# Altium PCB lagd_pcb.PcbDoc (part 4 of 7)
Units mm, origin at the board's own origin, x right, y up, seen from the top; angles counter-clockwise.
Board outline 172 x 145 mm, 6 copper layers (Top Layer, Layer 1, Layer 2, Layer 3, Layer 4, Bottom Layer), stack 0.816 mm thick; 588 components, 338 nets, 2165 pads, 565 vias.
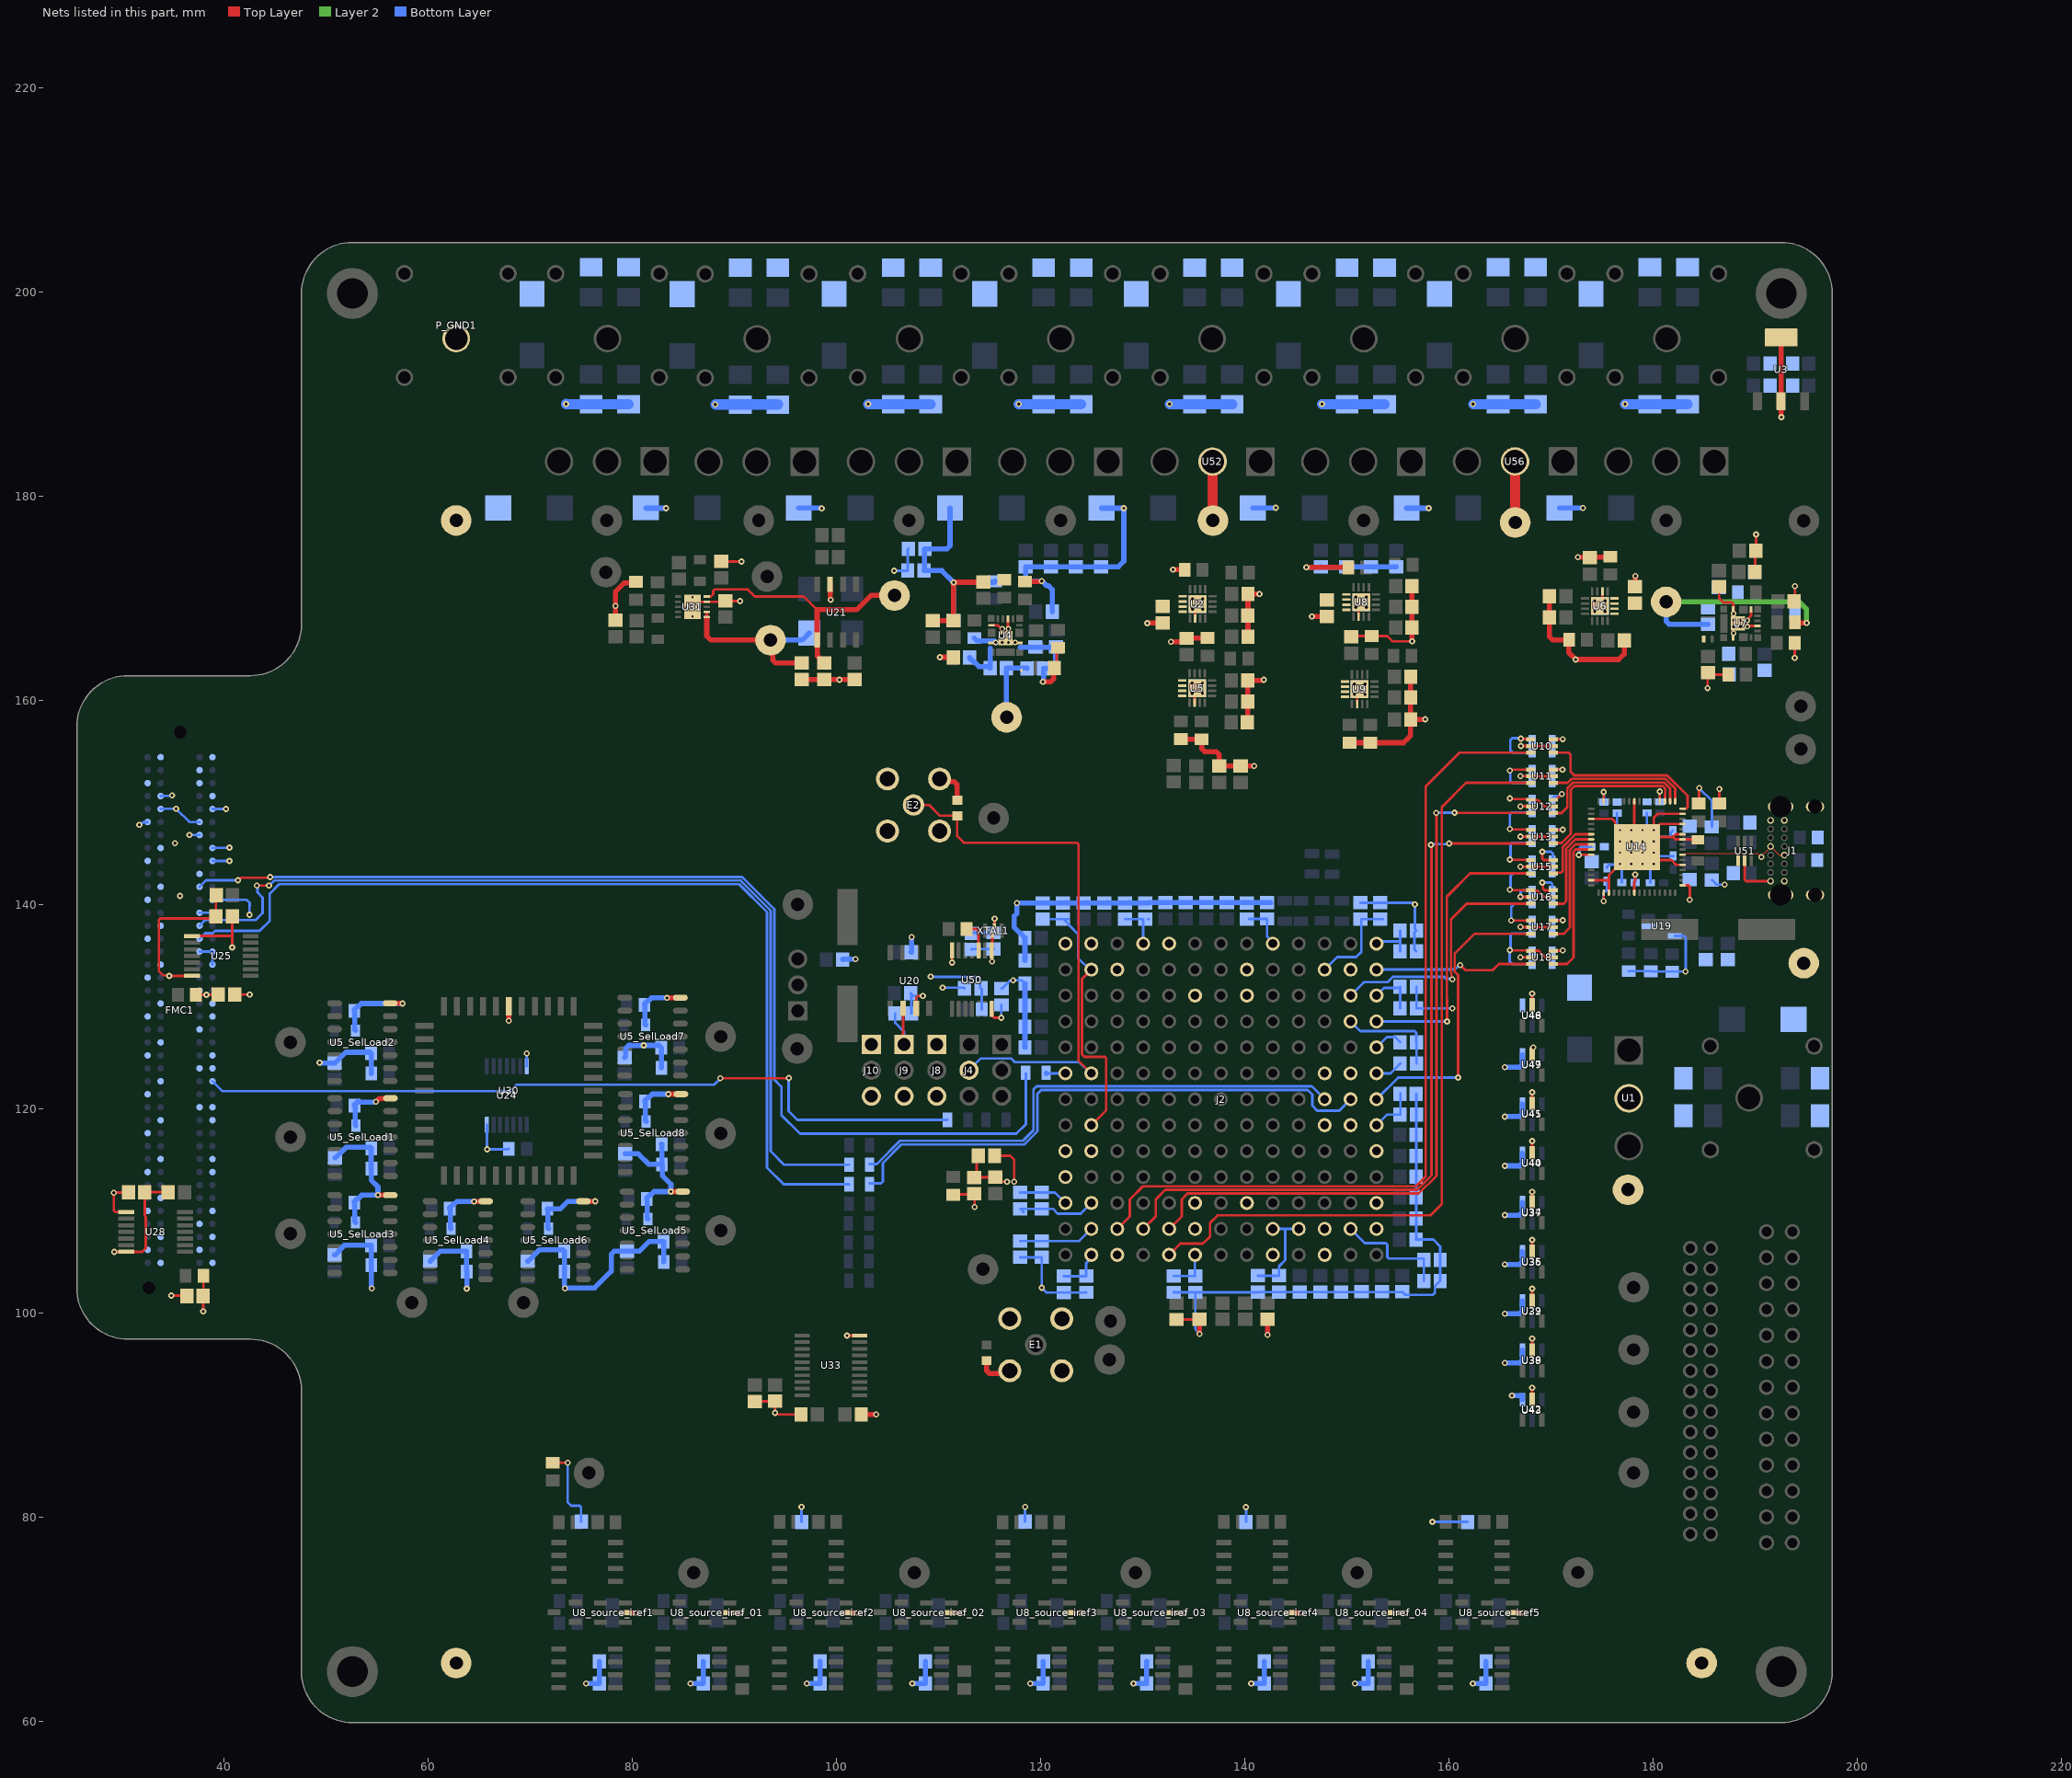
[diagram p7: the nets of this part, all layers, seen from the top]

## Part data (continued)
Y1: library part ABLS-12.000MHZ-B4-T, "CRYSTAL 12.0000MHZ 18PF SMD", ESR (Equivalent Series Resistance)="50 Ohms", Frequency Stability=±50ppm, Frequency Tolerance=±30ppm, Load Capacitance=18pF, MANUFACTURER="Abracon LLC", Operating Mode=Fundamental, Operating Temperature="-20°C ~ 70°C", Package / Case=HC-49/US, Supplier Part Number 1=535-10218-1-ND, ComponentLink1Description=Datasheet, ComponentLink1URL=https://abracon.com/Resonators/abls.pdf, ComponentLink2Description="DigiKey Link", ComponentLink2URL=https://www.digikey.com/en/products/detail/abracon-llc/ABLS-12-000MHZ-B4-T/2184161, Frequency="12 MHz", Height - Seated (Max)="0.165\" (4.20mm)", lastupdated="4/5/2026 8:41:04 PM", Lifecycle Status=Active, Minimum Order=1, Mounting Type="Surface Mount", packaging=TapeAndReel, PART NUMBER=ABLS-12.000MHZ-B4-T, Part Status=Active, partid=90, Price=0.11, series=ABLS, Size / Dimension="0.449\" L x 0.185\" W (11.40mm x 4.70mm)", Supplier 1=DigiKey, Type="MHz Crystal"
Y2: library part 9C-16.000MAAJ-T, "CRYSTAL 16.0000MHZ 18PF SMD", ESR (Equivalent Series Resistance)="30 Ohms", Frequency Stability=±30ppm, Load Capacitance=18pF, MANUFACTURER="TXC CORPORATION", Operating Mode=Fundamental, Operating Temperature="-20°C ~ 70°C", Package / Case=HC-49/US, Supplier Part Number 1=887-1059-1-ND, ComponentLink1Description=Datasheet, ComponentLink1URL=http://www.txccorp.com/download/products/quartz_crystals/2015TXC_9C_32.pdf, ComponentLink2Description="DigiKey Link", ComponentLink2URL=http://digikey.com/product-detail/en/txc-corporation/9C-16.000MAAJ-T/887-1059-1-ND/2118936, Frequency=16MHz, Frequency Tolerance=±30ppm, Height - Seated (Max)="0.161\" (4.10mm)", lastupdated="4/5/2026 8:41:30 PM", Lifecycle Status=Active, Minimum Order=1, Mounting Type="Surface Mount", packaging=TapeAndReel, PART NUMBER=9C-16.000MAAJ-T, Part Status=Active, partid=708, Price=0.22, series=9C, Size / Dimension="0.449\" L x 0.189\" W (11.40mm x 4.80mm)", Supplier 1=DigiKey, Type="MHz Crystal"

## Free pads (board coordinates)
  round 5 hole 3: ""(52.566,64.859) ""(52.566,199.859) ""(192.566,199.859) ""(192.566,64.859)
  rect 4x4 smd far side: ""(178.425,145.625)

## Via types
v1: diameter 0.6, hole 0.3, Top Layer to Bottom Layer, tented both sides, 505 vias
v2: diameter 0.3, hole 0.3, Top Layer to Bottom Layer, 20 vias
v3: diameter 0.55, hole 0.3, Top Layer to Bottom Layer, tented both sides, 18 vias
v4: diameter 0.55, hole 0.2, Top Layer to Bottom Layer, 16 vias
v5: diameter 0.6/0.6/0.6/0.6/0.6/0.6 (per signal layer), hole 0.3, Top Layer to Bottom Layer, tented both sides, 2 vias
v6: diameter 0.55/0.55/0.55/0.55/0.55/0.55 (per signal layer), hole 0.3, Top Layer to Bottom Layer, tented both sides, 2 vias
v7: diameter 1, hole 0.5, Top Layer to Bottom Layer, tented both sides, 2 vias

## Nets (pads, with @x,y where several pads share a name; then routed paths per layer and width w, separated by ;. In a path a pad name is that pad's centre, name@x,y a point inside that pad or via, vN(x,y) a via of type N, cw(c..) or ccw(c..) an arc to the next point about the centre after c; other vN are vias at no path point)
0.75V: C127.2 C128.2 C129.2 C130.2 C131.2 C132.2 C133.2 C134.2 C135.2 C136.2 C137.2 C138.2 C139.2 C140.2 C141.2 C142.2 J2.A2 J2.B12 J2.C2 J2.C6 J2.C8 J2.F2 J2.F11 J2.H13 J2.J13 J2.M2 J2.M11 J2.N9 J2.N13 U29.3 U34.3 U35.3 U38.3 U40.3 U41.3 U42.3 U46.3 U47.3 U52.2 VDDC.1 | length 92.7
  Top Layer w0.25: J2.F2@124.967,118.38 126.425,119.837 126.425,124.929 126.279,125.075 124.3,125.075 124.057,125.318 124.057,132.714 J2.M2@124.967,133.624 ; U42.3@168.15,91.541 v1(168.15,92.65) ; U38.3@168.15,95.866 U38.3@168.15,96.366 v1(168.15,97.475) ; U29.3@168.15,100.716 v1(168.15,102.375) ; U35.3@168.15,105.541 U35.3@168.15,106.041 168.15,106.15 v1(168.15,107.15) ; U34.3@168.15,110.366 v1(168.15,111.85) ; U40.3@168.15,115.216 v1(168.15,116.825) ; U41.3@168.15,120.516 v1(168.15,121.6) ; U47.3@168.15,124.841 U47.3@168.15,125.975 ; U46.3@168.15,129.666 168.153,129.669 U46.3@168.153,129.749 ; U46.3@168.153,130.163 v1@168.153,131.277
  Top Layer w1: U52.2@136.841,183.389 136.86,183.37 136.86,177.634 VDDC.1@136.88,177.615
  Bottom Layer w0.25: C138.2@118.317,109.874 C138.2@117.999,110.191 C137.2@120.103,110.191 121.213,110.191 121.679,109.725 123.928,109.725 J2.C2@124.967,110.764 ; 120.967,138.565 C141.2@122.766,138.565 ; C141.2@122.192,138.564 122.242,138.564 122.767,138.039 122.767,137.989 123.7,137.057 123.7,134.732 124.807,133.624 J2.M2@124.967,133.624 ; C135.2@122.267,103.589 124.435,103.589 C136.2@124.458,103.612 124.458,104.872 124.967,105.381 J2.A2@124.967,105.684 ; C140.2@140.417,138.564 140.442,138.589 C139.2@142.192,138.589 142.192,136.872 142.747,136.317 J2.N9@142.747,136.164 ; J2.M11@147.827,133.624 149.067,134.864 150.917,134.864 151.417,135.364 151.417,138.571 C133.2@153.525,138.571 ; J2.B12@150.367,108.224 151.752,106.839 153.821,106.839 153.967,106.693 153.967,105.462 154.114,105.316 157.544,105.316 C132.2@157.544,105.176 C131.2@157.544,103.129 ; J2.H13@152.907,123.464 154.292,123.464 155.219,124.392 C129.2@155.219,124.442 ; J2.J13@152.907,126.004 153.917,127.014 154.718,127.014 C130.2@155.219,126.513 ; J2.N13@152.907,136.164 153.122,136.379 155.219,136.379 ; C127.2@155.219,135.406 155.219,136.379 ; C128.2@155.219,137.451 155.219,136.379
  other v1: 168.255,125.993 168.156,131.277
1.0V: 12.1 C12.1 C26.2 C27.2 C47.1 L1.2 R12.2 U2.1 U2.2 U2.3 U2.4 U5.1 U5.2 U5.3 U5.4 U8.1 U8.2 U8.3 U8.4 U9.1 U9.2 U9.3 U9.4 | length 6.9
  Bottom Layer w0.5: C26.2@116.647,163.164 C26.2@116.66,163.152 ; 12.1@116.672,158.34 116.66,158.352 C26.2@116.66,163.152 ; C27.2@118.672,163.14 118.66,163.152 C26.2@116.66,163.152
1AD0: U10.4 U14.16 | length 17.5
  Top Layer w0.25: U10.4@170.217,154.875 171.7,154.875 171.925,154.65 171.925,153 172.275,152.65 181.375,152.65 183.375,150.65 183.375,149.531 183.229,149.385 U14.16@182.893,149.385
1AD0/: J2.B3 U10.3 | length 83.3
  Top Layer w0.25: J2.B3@127.507,108.224 128.737,109.454 128.737,111.114 130.017,112.394 156.754,112.394 157.725,113.365 157.725,151.575 161.025,154.875 U10.3@168.15,154.875
1AD1: U11.4 U14.17 | length 13.7
  Top Layer w0.25: U11.4@170.217,151.918 171.624,151.918 172.007,152.3 181.23,152.3 182.168,151.362 U14.17@182.168,150.11
1AD1/: J2.A5 U11.3 | length 78.3
  Top Layer w0.25: J2.A5@132.587,105.684 133.678,106.775 135.9,106.775 136.6,107.475 136.6,108.8 137.35,109.55 158.178,109.55 159.3,110.672 159.3,149.55 161.683,151.933 U11.3@168.195,151.933
1AD2: U12.4 U14.18 | length 15.3
  Top Layer w0.25: U12.4@170.217,148.961 171.016,148.961 171.6,149.545 171.6,151.399 172.151,151.95 181.085,151.95 181.668,151.367 U14.18@181.668,150.11
1AD2/: J2.B5 U12.3 | length 74.1
  Top Layer w0.25: J2.B5@132.587,108.224 133.817,109.454 133.817,111.114 134.392,111.689 157.039,111.689 158.775,113.425 v1(158.775,148.975) ; v1(160.55,149) 160.57,148.98 167.997,148.98 U12.3@168.01,148.968
  Bottom Layer w0.25: v1(158.775,148.975) 158.788,148.987 160.537,148.987 v1(160.55,149)
1AD3: U13.4 U14.19 | length 17.2
  Top Layer w0.25: U13.4@170.217,146.004 170.226,146.013 171.038,146.013 171.95,146.925 171.95,151.254 172.296,151.6 180.94,151.6 181.2,151.34 181.2,150.855 181.168,150.823 U14.19@181.168,150.11
1AD3/: J2.B4 U13.3 | length 73.6
  Top Layer w0.25: J2.B4@130.047,108.224 131.277,109.454 131.277,111.114 132.207,112.044 156.899,112.044 158.3,113.445 158.3,145.8 v1(158.25,145.85) ; v1(160.025,145.977) 160.038,145.99 168.004,145.99 U13.3@168.017,146.004
  Bottom Layer w0.25: v1(158.25,145.85) 158.313,145.913 159.962,145.913 v1(160.025,145.977)
1CD0: U14.38 U15.4 | length 6.7
  Top Layer w0.25: U15.4@170.217,143.047 170.286,143.116 171.004,143.116 171.15,143.262 171.15,145.63 172.405,146.885 U14.38@173.943,146.885
1CD0/: J2.K13 U15.3 | length 28.3
  Top Layer w0.25: v1(159.825,128.539) 159.825,130.784 159.8,130.809 159.8,140.775 162.072,143.047 U15.3@168.017,143.047
  Bottom Layer w0.25: J2.K13@152.907,128.544 152.91,128.542 159.822,128.542 v1(159.825,128.539)
1CD1: U14.39 U16.4 | length 9.3
  Top Layer w0.25: U16.4@170.217,140.09 171.254,140.09 171.5,140.336 171.5,145.485 172.4,146.385 U14.39@173.943,146.385
1CD1/: J2.L12 U16.3 | length 25.2
  Top Layer w0.25: v1(160.325,132.675) 160.258,132.742 160.258,133.224 160.2,133.282 160.2,138.55 161.74,140.09 U16.3@168.017,140.09
  Bottom Layer w0.25: J2.L12@150.367,131.084 151.672,132.389 153.989,132.389 154.514,132.914 159.525,132.914 159.698,132.742 160.258,132.742 v1(160.325,132.675)
1CD2: U14.40 U17.4 | length 11.8
  Top Layer w0.25: U17.4@170.217,137.133 171.258,137.133 171.85,137.725 171.85,145.34 172.395,145.885 U14.40@173.943,145.885
1CD2/: J2.G13 U17.3 | length 29.4
  Top Layer w0.25: v1(160.9,123.05) 160.9,133.077 160.575,133.402 160.575,135.2 162.508,137.133 U17.3@168.017,137.133
  Bottom Layer w0.25: J2.G13@152.907,120.924 155.033,123.05 v1(160.9,123.05)
1CD3: U14.41 U18.4 | length 14.5
  Top Layer w0.25: U18.4@170.217,134.176 171.576,134.176 172.2,134.8 172.2,145.195 172.39,145.385 U14.41@173.943,145.385
1CD3/: J2.M13 U18.3 | length 15.8
  Top Layer w0.25: v1(161.1,134.075) 161.611,133.564 164.289,133.564 164.9,134.175 U18.3@168.017,134.176
  Bottom Layer w0.25: J2.M13@152.907,133.624 160.596,133.624 161.046,134.075 v1(161.1,134.075)
2.0V: 13.1 C33.1 C48.2 L2.2 R25.2 U6.1 U6.2 U6.3 U6.4 | length 22.7
  Top Layer w0.5: R25.2@193.895,167.636 193.937,167.594 195.031,167.594 v1(195.05,167.575)
  Layer 2 w0.5: 13.1@181.286,169.65 194.325,169.65 195.05,168.925 v1(195.05,167.575)
  Bottom Layer w0.5: 13.1@181.286,169.65 181.286,167.754 181.579,167.461 C48.2@185.371,167.461
3V3_MUXED: C68.2 C70.2 C72.2 C74.2 C75.1 C76.2 C77.2 C78.2 C81.2 C83.2 C85.2 C87.2 C89.2 C95.2 C210.2 C211.2 C212.2 FB2.1 FB3.1 J8.1 J9.1 J10.1 R31.2 R34.1 R35.1 R36.1 R46.1 U1.2 U10.6 U11.6 U12.6 U13.6 U14.20 U14.31 U14.42 U14.50 U14.56 U15.6 U16.6 U17.6 U18.6 U19.6 U20.2 U50.1 VDD1.1 XTAL1.4 | length 69.9
  Top Layer w0.25: U20.2@106.532,129.826 106.537,129.821 J9.1@106.537,126.304 ; v1(115.242,134.414) 115.23,134.427 115.23,135.548 115.217,135.56 115.261,135.604 XTAL1.4@115.261,137.018 ; v1(169.15,142.15) 169.217,142.083 169.217,141.565 169.392,141.39 U16.6@170.217,141.39 ; v1(169.15,145.175) 169.15,144.493 169.296,144.347 U15.6@170.217,144.347 ; U12.6@170.217,150.261 170.467,150.261 171.031,150.825 v1(171.075,150.825) ; U10.6@170.217,156.175 170.229,156.187 171.137,156.187 v1(171.149,156.2) ; U13.6@170.229,147.312 v1@171.137,147.312 ; U11.6@170.254,153.212 170.262,153.22 171.125,153.22 v1(171.127,153.222) ; U17.6@170.279,138.437 v1@171.187,138.437 ; U18.6@170.304,135.487 v1@171.212,135.487 ; v1(172.725,144.86) 172.75,144.885 U14.42@173.943,144.885 ; v1(175.15,140.325) 175.168,140.343 U14.50@175.168,141.16 ; U14.31@175.168,150.11 175.168,151.018 v1(175.175,151.025) ; U14.56@178.168,141.16 178.168,142.243 178.25,142.325 v1(178.25,142.95) ; U14.20@180.668,150.11 v1(180.668,151.075) ; R31.2@184.475,149.9 184.5,149.925 v1@184.5,151.4
  Bottom Layer w0.25: C95.2@105.742,129.34 105.746,129.336 105.746,128.411 106.624,127.533 J9.1@106.624,126.304 ; v1(109.225,132.925) 113.932,132.925 114.079,132.779 114.079,131.853 C211.2@114.142,131.789 114.217,131.714 R46.1@114.217,129.739 ; C212.2@113.242,135.59 113.292,135.64 C210.2@115.392,135.64 115.242,135.49 v1(115.242,134.414) ; v1(169.15,142.15) 169.979,142.15 170.125,142.004 C85.2@170.125,141.375 ; v1(169.15,145.175) 170.004,145.175 170.175,145.004 170.175,144.425 C83.2@170.125,144.375 ; C89.2@170.125,135.45 170.175,135.5 v1(171.149,135.5) ; C87.2@170.125,138.475 170.15,138.45 v1(171.149,138.45) ; C74.2@170.125,147.35 170.15,147.325 v1(171.149,147.325) ; C72.2@170.125,150.292 170.125,150.392 170.35,150.617 170.772,150.617 170.98,150.825 v1(171.075,150.825) ; C70.2@170.125,153.233 170.136,153.222 v1(171.127,153.222) ; C68.2@170.125,156.175 170.15,156.2 v1(171.149,156.2) ; v1(172.725,144.86) 172.792,144.927 172.792,145.529 172.938,145.675 C75.1@173.925,145.675 ; v1(175.15,140.325) 175.15,141.119 175.475,141.444 C81.2@175.475,142.275 ; v1(175.175,151.025) 175.175,150.05 C78.2@175.2,150.025 ; R36.1@177.6,133.475 R34.1@179.775,133.475 ; C76.2@178.25,142.15 v1(178.25,142.95) ; R34.1@179.775,133.45 179.8,133.425 v1(183.175,133.425) 183.2,133.45 183.2,136.754 183.029,136.925 U19.6@182.125,136.925 ; v1(180.668,151.075) 180.668,150.082 C77.2@180.7,150.05 ; v1(184.525,151.4) 185.764,150.161 FB2.1@185.764,147.6 ; FB3.1@185.764,142.405 186.219,141.95 v1(187,141.95)
10V: 10V.1 C113.2 D2.2 U31.1 U31.2 | length 17.9
  Top Layer w0.25: U31.1@87.288,168.162 U31.2@87.288,168.662
  Top Layer w0.5: U31.1@87.288,168.162 87.288,166.312 87.7,165.9 10V.1@93.535,165.9 93.76,165.675 93.76,163.943 94.053,163.65 C113.2@96.6,163.65
  Bottom Layer w0.5: 10V.1@93.535,165.9 96.647,165.9 D2.2@97.34,166.593
-5V: C114.2 m5V.1 U21.5 U31.5 | length 25.8
  Top Layer w0.25: U31.5@87.288,170.162 87.688,170.162 87.913,170.387 87.913,170.715 88.06,170.861 91.314,170.861 92,170.175 93.773,170.175 96.805,170.175 98.105,168.875
  Top Layer w0.5: C114.2@98.8,163.65 98.75,163.65 98.35,164.05 98.35,164.125 98.132,164.343 98.132,165.884 U21.5@98.102,165.914 98.102,168.875 101.975,168.875 103.375,170.275 m5V.1@105.686,170.275
A0: C1.2 C3.2 C4.2 C5.2 C6.2 C7.2 C8.2 C9.2 C10.2 C11.2 C12.2 C13.1 C14.1 C15.1 C16.1 C17.1 C18.1 C19.1 C20.1 C21.1 C22.2 C23.1 C24.1 C26.1 C27.1 C28.2 C29.1 C30.1 C31.1 C32.1 C33.2 C34.1 C35.1 C36.1 C37.1 C38.1 C39.1 C40.1 C41.1 C42.1 C43.2 C44.1 C45.1 C47.2 C48.1 C49.1 C50.1 C51.2 C52.1 C53.1 C54.1 C55.2 C56.1 C57.1 C58.1 C59.1 C60.1 C61.1 C62.1 C63.1 C64.1 C65.1 C66.2 C67.2 C68.1 C69.2 C70.1 C71.2 C72.1 C73.2 C74.1 C75.2 C76.1 C77.1 C78.1 C79.1 C80.1 C81.1 C82.2 C83.1 C84.2 C85.1 C86.2 C87.1 C88.2 C89.1 C90.1 C91.1 C92.1 C93.1 C94.1 C95.1 C96.2 C97.2 C98.2 C99.2 C100.2 C101.2 C102.2 C103.2 C104.2 C105.2 C106.2 C107.2 C108.2 C109.2 C110.2 C113.1 C114.1 C115.1 C116.1 C117.1 C118.1 C119.1 C120.1 C121.1 C122.1 C123.1 C124.1 C125.1 C126.1 C127.1 C128.1 C129.1 C130.1 C131.1 C132.1 C133.1 C134.1 C135.1 C136.1 C137.1 C138.1 C139.1 C140.1 C141.1 C142.1 C144.1 C145.1 C146.1 C147.1 C148.1 C149.1 C150.1 C151.1 C152.1 C153.1 C154.1 C155.1 C156.1 C157.1 C158.1 C159.1 C160.1 C162.1 C163.1 C164.1 C165.1 C166.1 C167.1 C168.1 C169.1 C170.1 C171.1 C172.1 C173.1 C174.1 C175.1 C176.1 C177.1 C178.1 C179.1 C180.1 C181.1 C184.1 C185.1 C186.2 C187.1 C188.1 C189.2 C190.2 C191.1 C192.1 C193.2 C194.1 C195.2 C196.1 C199.1 C201.1 C203.1 C204.1 C205.1 C206.1 C207.1 C208.1 C209.1 C210.1 C211.1 C212.1 C213.1 C214.2 C215.2 C216_source_iref1.1 C216_source_iref2.1 C216_source_iref3.1 C216_source_iref4.1 C216_source_iref5.1 C216_source_iref_01.1 C216_source_iref_02.1 C216_source_iref_03.1 C216_source_iref_04.1 C220_SelLoad1.1 C220_SelLoad2.1 C220_SelLoad3.1 C220_SelLoad4.1 C220_SelLoad5.1 C220_SelLoad6.1 C220_SelLoad7.1 C220_SelLoad8.1 C221.2 C222.2 C223.2 C224.2 C225.2 C226.2 C227.2 C228.2 C229.2 C230.2 C231.2 C232.2 C233.2 C234.2 C235.2 C236.2 C237.1 C239.1 C240.1 C242_u_sink_iref_gen1.1 C242_u_sink_iref_gen2.1 C242_u_sink_iref_gen3.1 C242_U_sink_iref_gen4.1 C242_u_sink_iref_gen5.1 C243_source_iref1.1 C243_source_iref2.1 C243_source_iref3.1 C243_source_iref4.1 C243_source_iref5.1 C243_source_iref_01.1 C243_source_iref_02.1 C243_source_iref_03.1 C243_source_iref_04.1 C244.2 C245.2 C246.2 C247.2 C248.2 C249.2 C250.2 C251.2 E1.SH1 E1.SH2 E1.SH3 E1.SH4 E2.SH1 E2.SH2 E2.SH3 E2.SH4 FMC1.C1 FMC1.C4 FMC1.C5 FMC1.C8 FMC1.C9 FMC1.C12 FMC1.C13 FMC1.C16 FMC1.C17 FMC1.C20 FMC1.C21 FMC1.C24 FMC1.C25 FMC1.C28 FMC1.C29 FMC1.C32 FMC1.C33 FMC1.C36 FMC1.C38 FMC1.C40 FMC1.D2 FMC1.D3 FMC1.D6 FMC1.D7 FMC1.D10 FMC1.D13 FMC1.D16 FMC1.D19 FMC1.D22 FMC1.D25 FMC1.D28 FMC1.D37 FMC1.D39 FMC1.G1 FMC1.G4 FMC1.G5 FMC1.G8 FMC1.G11 FMC1.G14 FMC1.G17 FMC1.G20 FMC1.G23 FMC1.G26 FMC1.G29 FMC1.G32 FMC1.G35 FMC1.G38 FMC1.G40 FMC1.H3 FMC1.H6 FMC1.H9 FMC1.H12 FMC1.H15 FMC1.H18 FMC1.H21 FMC1.H24 FMC1.H27 FMC1.H30 FMC1.H33 FMC1.H36 FMC1.H39 GND1.1 GND2.1 GND3.1 GND4.1 J1.1 J1.8 J1.9 J1.16 J1.17 J1.18 J1.19 J1.20 J2.A9 J2.A11 J2.B6 J2.B11 J2.B13 J2.C1 J2.C13 J2.D1 J2.E2 J2.E13 J2.F12 J2.H12 J2.K12 J2.L8 J2.M12 J2.N1 J2.N2 J2.N5 J8.3 J9.3 J10.3 P_GND1.1 pad.@178.425,145.625 R2.1 R3_SelLoad1.1 R3_SelLoad2.1 R3_SelLoad3.1 R3_SelLoad4.1 R3_SelLoad5.1 R3_SelLoad6.1 R3_SelLoad7.1 R3_SelLoad8.1 R4_SelLoad1.1 R4_SelLoad2.1 R4_SelLoad3.1 R4_SelLoad4.1 R4_SelLoad5.1 R4_SelLoad6.1 R4_SelLoad7.1 R4_SelLoad8.1 R5_SelLoad1.1 R5_SelLoad2.1 R5_SelLoad3.1 R5_SelLoad4.1 R5_SelLoad5.1 R5_SelLoad6.1 R5_SelLoad7.1 R5_SelLoad8.1 R6_SelLoad1.1 R6_SelLoad2.1 R6_SelLoad3.1 R6_SelLoad4.1 R6_SelLoad5.1 R6_SelLoad6.1 R6_SelLoad7.1 R6_SelLoad8.1 R9.1 R13.1 R14.1 R15.1 R17.1 R19.1 R20.1 R21.1 R22.1 R23.1 R27.1 R28.1 R29.1 R32.1 R33.1 R45.1 R48.1 R69.2 R70.2 R71.1 R72.1 R73.1 R74.1 R75.1 R79.2 U2.6 U2.17 U3.2 U3.4 U4.2 U4.4 U4.8 U4.13 U4.16 U5.6 U5.17 U5_SelLoad1.7 U5_SelLoad2.7 U5_SelLoad3.7 U5_SelLoad4.7 U5_SelLoad5.7 U5_SelLoad6.7 U5_SelLoad7.7 U5_SelLoad8.7 U6.6 U6.17 U7.2 U7.4 U7.8 U7.13 U7.16 U8.6 U8.17 U8_source_iref1.2 U8_source_iref2.2 U8_source_iref3.2 U8_source_iref4.2 U8_source_iref5.2 U8_source_iref_01.2 U8_source_iref_02.2 U8_source_iref_03.2 U8_source_iref_04.2 U9.6 U9.17 U10.2 U10.5 U11.2 U11.5 U12.2 U13.2 U13.5 U14.1 U14.5 U14.10 U14.11 U14.13 U14.15 U14.25 U14.35 U14.47 U14.51 U14.65 U15.2 U15.5 U16.2 U17.2 U17.5 U18.2 U19.2 U20.3 U21.3 U24.7 U25.7 U28.7 U30.23 U31.4 U31.11 U32.1 U33.10 U36.1 U37.1 U39.1 U43.1 U44.1 U45.1 U48.1 U49.1 U50.7 U51.2 XTAL1.2 | length 772.6
  Top Layer w0.25: v1(29.225,105.975) 29.228,105.978 30.369,105.978 U28.7@30.372,105.981 ; U28.7@30.423,105.981 31.981,105.981 32.325,106.325 32.325,109.379 32.225,109.479 C201.1@32.225,111.825 C203.1@34.525,111.825 ; v1(34.825,101.7) 36.3,101.7 C199.1@36.35,101.65 ; U25.7@36.858,133.011 36.852,133.005 34.63,133.005 v1(34.625,133) 34.558,133.067 34.033,133.067 33.6,133.5 33.6,138.475 33.75,138.625 38.975,138.625 C194.1@39.2,138.85 39.2,140.9 C192.1@39.225,140.925 ; C196.1@41.025,131.175 v1(42.5,131.175) ; R45.1@72.175,85.325 v1(73.65,85.325) ; U31.11@85.888,169.162 86.388,169.662 U31.4@87.288,169.662 C239.1@89.112,169.662 ; C240.1@88.712,173.613 88.725,173.6 v1(90.675,173.6) ; C239.1@89.112,169.762 89.149,169.725 v1(90.55,169.725) ; C207.1@92,91.325 93.95,91.325 C208.1@93.975,91.35 v1(93.975,90.2) 94.125,90.05 C204.1@96.525,90.05 ; v1(101.025,97.775) U33.10@102.275,97.775 ; U20.3@107.802,129.826 107.802,130.893 107.949,131.04 v1(108.467,131.04) ; v1(111.317,134.314) U50.7@111.317,135.33 ; C19.1@111.437,164.225 C19.1@111.447,164.215 ; C187.1@113.892,115.389 113.725,115.222 113.725,113.497 C191.1@113.492,113.264 115.542,113.264 C188.1@115.567,113.289 ; U4.2@115.162,167.36 115.796,167.36 v6@116.155,167.001 ; XTAL1.2@115.467,137.874 115.479,137.886 115.479,138.601 v1(115.492,138.614) ; C188.1@115.581,113.304 116.035,112.85 v1(116.7,112.85) ; U4.13@116.797,167.99 116.797,167.056 v3(116.847,167.006) ; C29.1@121.562,163.36 R22.1@121.562,165.135 ; C179.1@133.3,99.35 135.55,99.35 135.563,99.362 C184.1@135.575,99.375 ; v2(134.832,160.688) 134.847,160.688 135.09,160.445 U5.6@135.09,159.748 ; v2(134.875,168.932) 134.889,168.932 135.132,168.688 U2.6@135.132,167.992 ; C50.1@150.427,166.218 150.502,166.293 R73.1@152.452,166.293 153.959,166.293 154.463,165.79 v1(156.392,165.79) ; v2(150.75,160.58) 150.764,160.58 151.008,160.337 U9.6@151.008,159.64 ; v2(150.892,169.115) 150.907,169.115 151.15,168.871 U8.6@151.15,168.175 ; v1(167.021,134.834) U18.2@167.988,134.834 ; v1(167.021,137.791) U17.2@167.988,137.791 ; v1(167.021,140.748) U16.2@167.988,140.748 ; v1(167.021,143.705) U15.2@167.988,143.705 ; v1(167.021,146.662) U13.2@167.988,146.662 ; v1(167.021,149.619) U12.2@167.988,149.619 ; v1(167.021,152.576) U11.2@167.988,152.576 ; v1(167.05,155.525) U10.2@168.017,155.525 U10.5@170.217,155.525 ; U17.2@168.017,137.783 U17.5@170.217,137.783 ; U15.2@168.017,143.697 U15.5@170.217,143.697 ; U13.2@168.017,146.654 U13.5@170.217,146.654 ; U11.2@168.017,152.568 U11.5@170.217,152.568 ; U14.47@173.943,142.385 175.653,142.385 175.668,142.4 ; U14.35@173.943,148.385 176.015,148.385 176.293,148.107 176.293,147.76 v4(176.768,147.285) ; U6.17@174.786,169.231 175.036,169.481 U6.6@175.036,170.679 ; U14.51@175.668,141.16 175.668,142.4 ; v4(176.768,143.985) 175.668,142.885 175.668,142.4 ; v4(177.868,147.285) 178.168,147.585 U14.25@178.168,150.11 ; v4(178.968,145.085) 179.695,144.359 181.791,144.359 182.265,143.885 U14.5@182.893,143.885 ; v4(180.068,146.185) 180.483,146.6 181.975,146.6 182.04,146.535 ; U14.1@182.893,141.885 183.454,141.885 183.6,141.739 v1(183.6,140.475) ; U14.11@182.893,146.885 182.213,146.885 182.04,146.712 182.04,146.535 ; U14.13@182.893,147.885 181.68,147.885 180.668,147.885 180.075,147.292 180.075,148.5 180.46,148.885 U14.15@182.893,148.885 ; R33.1@184.4,146.35 184.365,146.385 U14.10@182.893,146.385 182.693,146.385 182.19,146.385 182.04,146.535 ; v1(185.35,161.2) 185.35,162.665 C49.1@185.396,162.711 185.596,162.511 R72.1@187.371,162.511 ; C40.1@186.471,171.136 186.471,170.004 186.9,169.575 187.737,169.575 187.895,169.416 v3(187.895,168.486) ; R32.1@186.5,149.9 v1(186.5,151.325) ; U51.2@188.976,144.278 188.976,142.436 189.122,142.29 J1.1@191.516,142.29 ; v3(189.236,167.236) 189.286,167.286 U7.13@190.221,167.286 ; v6(189.236,167.836) 189.236,167.917 189.596,168.276 U7.2@189.596,168.911 ; C37.1@189.996,172.586 189.996,174.586 C41.1@190.071,174.661 190.1,174.69 v1(190.1,176.25) ; C52.1@193.821,169.711 193.9,169.79 v1(193.9,171.2) ; R71.1@193.871,165.611 193.875,165.606 v1(193.875,164.15)
  Top Layer w0.5: v1(54.875,120.675) 54.902,120.675 55.233,121.006 56.281,121.006 U5_SelLoad1.7@56.3,121.025 ; v1(55.075,111.525) U5_SelLoad3.7@56.275,111.525 ; U5_SelLoad2.7@56.275,130.325 56.287,130.312 57.463,130.312 v1(57.475,130.3) ; v1(64.487,110.912) 65.613,110.912 U5_SelLoad4.7@65.625,110.925 ; v1(67.9,128.6) U30.23@67.9,130.03 ; U5_SelLoad6.7@75.2,110.925 v1(76.35,110.925) ; C237.1@78.363,167.838 78.356,167.844 78.356,169.244 v1(78.35,169.25) 78.35,170.65 79.205,171.505 80.23,171.505 R48.1@80.337,171.612 ; U8_source_iref1.2@79.323,70.616 U8_source_iref1.2@79.327,70.62 ; U8_source_iref1.2@79.33,70.622 v1@80.472,70.622 ; v1(83.4,130.85) 83.412,130.862 84.688,130.862 U5_SelLoad7.7@84.7,130.875 ; v1(83.525,121.425) U5_SelLoad8.7@84.75,121.425 ; v1(83.775,111.875) U5_SelLoad5.7@84.925,111.875 ; U8_source_iref_01.2@89.523,70.616 U8_source_iref_01.2@89.526,70.618 ; U8_source_iref_01.2@89.527,70.62 U8_source_iref_01.2@89.526,70.618 ; v1@90.668,70.618 U8_source_iref_01.2@89.526,70.618 ; C113.1@97.086,162.053 98.8,162.053 98.815,162.037 100.288,162.037 v1(100.3,162.025) 100.314,162.039 101.771,162.039 C209.1@101.785,162.053 ; U21.3@99.372,171.362 99.374,171.361 99.374,169.928 99.425,169.877 v1(99.425,169.85) ; U8_source_iref2.2@100.948,70.616 U8_source_iref2.2@100.951,70.618 ; U8_source_iref2.2@100.952,70.62 U8_source_iref2.2@100.951,70.618 ; v1@102.093,70.618 U8_source_iref2.2@100.951,70.618 ; C205.1@102.425,90.05 v1(103.875,90.05) ; C20.1@109.447,167.79 C16.1@111.472,167.79 ; E2.SH2@110.1,152.3 110.342,152.058 111.51,152.058 111.803,151.765 111.803,150.395 111.825,150.373 R79.2@111.825,150.215 ; v1(110.125,164.225) C19.1@111.437,164.225 ; U8_source_iref_02.2@111.273,70.616 U8_source_iref_02.2@111.276,70.618 ; U8_source_iref_02.2@111.277,70.62 U8_source_iref_02.2@111.276,70.618 ; C16.1@111.522,167.79 111.474,167.838 111.474,171.549 v1(111.475,171.55) 111.494,171.569 114.352,171.569 C32.1@114.372,171.59 ; v1@112.418,70.618 U8_source_iref_02.2@111.276,70.618 ; R2.1@114.7,95.335 114.7,94.343 114.993,94.05 116.7,94.05 E1.SH4@116.975,94.325 ; R21.1@118.447,171.639 120.052,171.639 120.087,171.675 v1(120.115,171.675) ; v1(120.225,161.825) 120.244,161.806 120.982,161.806 121.275,162.099 121.275,163.092 C29.1@121.347,163.164 ; U8_source_iref3.2@122.823,70.616 U8_source_iref3.2@122.826,70.618 ; U8_source_iref3.2@122.827,70.62 U8_source_iref3.2@122.826,70.618 ; v1@123.968,70.618 U8_source_iref3.2@122.826,70.618 ; v1(130.442,167.564) 130.455,167.577 131.945,167.577 C12.2@131.958,167.59 ; v1(132.775,165.725) 132.786,165.714 132.792,165.714 132.811,165.734 133.953,165.734 C21.1@134.29,166.071 134.315,166.096 136.315,166.096 R13.1@136.34,166.121 ; U8_source_iref_03.2@132.955,70.62 134.047,70.62 v1(134.05,70.623) ; v1(132.967,172.815) 132.977,172.805 134.106,172.805 R9.1@134.115,172.796 ; R14.1@133.715,156.196 133.719,156.192 135.779,156.192 R15.1@135.783,156.188 135.783,155.268 136.076,154.975 137.199,154.975 137.492,154.682 C178.1@137.492,153.564 C144.1@139.592,153.564 v1(140.933,153.564) ; v1(135.55,97.925) 135.563,97.938 C184.1@135.563,99.362 ; C28.2@140.265,157.846 140.278,157.859 140.278,159.896 C30.1@140.29,159.909 ; C30.1@140.29,159.896 C30.1@140.29,159.909 ; C31.1@140.29,161.971 C31.1@140.29,161.612 ; C22.2@140.315,166.221 C23.1@140.315,170.421 140.318,170.418 141.439,170.418 v1(141.442,170.415) ; v1(141.867,162.014) 141.84,162.014 141.79,161.964 140.69,161.964 140.338,161.612 C31.1@140.29,161.612 ; v1(142.217,97.844) C185.1@142.217,99.364 ; U8_source_iref4.2@144.473,70.616 U8_source_iref4.2@144.477,70.62 ; U8_source_iref4.2@144.48,70.622 v1@145.622,70.622 ; v1(146.042,173.039) 146.053,173.029 150.142,173.029 R27.1@150.152,173.018 ; v1(146.578,168.222) 148.049,168.222 C47.2@148.052,168.218 ; R74.1@150.253,155.844 R75.1@152.285,155.844 155.549,155.844 155.905,156.2 156.26,156.555 C55.2@156.26,158.116 ; U8_source_iref_04.2@154.652,70.62 154.655,70.622 155.797,70.622 v1@155.8,70.625 ; C57.1@156.26,162.307 C56.1@156.26,160.275 C55.2@156.26,158.116 ; C54.1@156.387,171.197 C51.2@156.387,167.133 156.39,167.131 156.39,165.792 v1(156.392,165.79) ; v1(157.675,158.15) 157.648,158.15 157.614,158.116 C55.2@156.26,158.116 ; U8_source_iref5.2@166.202,70.62 166.205,70.622 167.347,70.622 v1@167.35,70.625 ; C44.1@169.855,170.2 169.855,166.218 170.148,165.925 R23.1@171.775,165.925 171.725,165.875 171.725,164.7 v1(172.425,164) 176.632,164 177.175,164.543 C42.1@177.175,165.875 ; v1(172.625,174.025) 172.644,174.006 173.769,174.006 C43.2@173.8,173.975 173.85,174.025 175.775,174.025 R17.1@175.825,174.075 ; C33.2@178.225,171.125 178.256,171.156 178.256,172.156 v1(178.275,172.175) ; U3.4@192.55,195.55 U3.2@192.55,189.3 192.563,189.288 192.563,187.762 v1(192.575,187.75) ; C30.1@140.29,159.909 C31.1@140.29,161.612
  Bottom Layer w0.25: v1(31.7,147.8) 31.795,147.8 32.053,148.058 32.488,148.058 FMC1.H6@32.512,148.082 ; FMC1.G5@33.782,149.352 33.805,149.375 v1(35.3,149.375) 36.593,148.082 FMC1.D6@37.592,148.082 ; FMC1.G4@33.782,150.622 33.808,150.648 34.873,150.648 v1(34.9,150.675) ; v1(36.6,146.8) 36.606,146.806 37.586,146.806 FMC1.D7@37.592,146.812 ; FMC1.D16@37.592,135.382 FMC1.C16@38.862,135.382 FMC1.C17@38.862,134.112 ; FMC1.D13@37.592,139.192 FMC1.C13@38.862,139.192 ; FMC1.C12@38.862,140.462 42.188,140.462 42.496,140.154 42.496,139.8 42.475,139.779 v1(42.475,139) ; FMC1.C9@38.862,144.272 38.863,144.273 40.523,144.273 v1(40.525,144.275) ; FMC1.C8@38.862,145.542 38.878,145.558 40.508,145.558 v1(40.525,145.575) ; FMC1.C5@38.862,149.352 38.873,149.363 v1(40.188,149.363) ; U24.7@69.65,124.17 v1(69.65,125.4) ; v1(73.65,85.325) 73.65,81.45 74,81.1 74.829,81.1 74.975,80.954 74.975,79.575 C242_u_sink_iref_gen1.1@75,79.55 ; v1(96.575,81) 96.575,79.55 C242_u_sink_iref_gen2.1@96.6,79.525 ; C93.1@107.267,131.315 C93.1@107.342,131.24 ; C95.1@107.342,129.34 C93.1@107.342,131.24 ; v1(108.467,131.04) 107.542,131.04 C93.1@107.342,131.24 ; J8.3@109.83,121.224 J8.3@110.082,121.224 ; v1(110.4,131.85) 112.482,131.85 C211.1@112.542,131.789 ; C212.1@113.242,137.189 113.292,137.239 C210.1@115.392,137.239 115.492,137.339 v1(115.492,138.614) ; C213.1@116.167,131.764 116.217,131.764 116.961,132.508 117.233,132.508 v1(117.3,132.575) 118.159,132.575 C149.1@118.465,132.268 ; C125.1@117.999,105.438 C126.1@120.103,105.438 v1(120.103,102.453) 120.567,101.989 C135.1@122.267,101.989 124.435,101.989 C136.1@124.458,102.012 ; C138.1@117.999,111.791 C137.1@120.103,111.791 121.4,111.791 J2.C1@122.427,110.764 ; C242_u_sink_iref_gen3.1@118.475,79.55 v1(118.475,81) ; J2.D1@122.147,113.304 J2.D1@122.427,113.304 ; C121.1@133.043,102.012 C122.1@135.147,102.012 ; v1(135.55,97.925) 135.55,98.02 135.147,98.422 C122.1@135.147,102.012 ; C242_U_sink_iref_gen4.1@140.125,79.525 v1(140.125,80.975) ; J2.K12@150.367,128.544 151.312,127.6 156.639,127.6 156.797,127.442 156.797,126.536 C130.1@156.819,126.513 C129.1@156.819,124.442 ; C134.1@151.325,140.175 152.298,140.175 152.287,140.165 156.529,140.165 v1(156.675,140.018) 156.675,137.595 C128.1@156.819,137.451 156.625,137.256 156.625,135.6 C127.1@156.819,135.406 ; C118.1@156.792,121.464 156.792,107.202 C168.1@156.769,107.179 158.453,107.179 159.144,106.487 C132.1@159.144,105.176 C131.1@159.144,103.129 158.619,102.604 158.619,101.941 158.442,101.764 155.742,101.764 C167.1@155.442,102.064 155.419,102.041 C123.1@143.354,102.041 C124.1@141.275,102.041 141.246,102.012 C122.1@135.147,102.012 ; C116.1@156.819,131.936 C115.1@156.819,129.832 156.826,129.825 v1(160.35,129.825) ; v1(158.375,79.525) C242_u_sink_iref_gen5.1@161.85,79.525 ; v1(167.021,140.748) 167.021,141.229 167.168,141.375 C84.2@168.15,141.375 ; C85.1@170.05,140.15 C85.1@170.125,140.075 ; C81.1@175.475,143.575 175.475,143.675 175.7,143.9 176.768,143.9 pad.@176.768,143.968 ; C64.1@176.475,148.95 176.475,147.575 176.765,147.285 v4(176.768,147.285) ; C76.1@176.95,142.15 pad.@176.95,143.985 ; pad.@178.425,145.625 179.425,146.625 181.575,146.625 181.725,146.775 181.725,147.025 C63.1@181.95,147.25 ; pad.@179.4,146.692 C66.2@179.4,148.975 ; C65.1@179.725,142.125 179.725,144.325 179.3,144.75 C80.1@181.975,144.75
  Bottom Layer w0.5: v1(49.35,124.5) 49.363,124.487 50.813,124.487 C220_SelLoad2.1@50.825,124.475 ; C220_SelLoad3.1@50.825,105.675 50.875,105.675 51.275,106.075 51.275,106.125 51.775,106.625 R5_SelLoad3.1@54.4,106.625 54.413,106.612 54.413,104.662 R6_SelLoad3.1@54.425,104.65 54.425,102.477 54.475,102.427 v1(54.475,102.4) ; C220_SelLoad1.1@50.85,115.175 50.9,115.175 51.95,116.225 54.325,116.225 R5_SelLoad1.1@54.425,116.125 54.4,116.1 54.4,114.15 54.407,114.143 54.407,113.018 55.075,112.35 v1(55.075,111.525) 53.475,111.525 53.175,111.225 53.075,111.225 52.75,110.9 R4_SelLoad3.1@52.75,110.8 52.813,110.737 52.813,108.912 R3_SelLoad3.1@52.875,108.85 ; C220_SelLoad2.1@50.875,124.475 51.925,125.525 54.3,125.525 R5_SelLoad2.1@54.4,125.425 54.413,125.412 54.413,123.462 R6_SelLoad2.1@54.425,123.45 ; R3_SelLoad2.1@52.875,127.65 52.813,127.712 52.813,129.537 R4_SelLoad2.1@52.75,129.6 52.75,129.7 53.075,130.025 53.175,130.025 53.45,130.3 v1(57.475,130.3) ; R3_SelLoad1.1@52.9,118.35 52.838,118.412 52.838,120.237 R4_SelLoad1.1@52.775,120.3 52.775,120.4 53.1,120.725 53.1,120.656 54.856,120.656 v1(54.875,120.675) ; C220_SelLoad4.1@60.175,105.075 60.225,105.075 61.175,106.025 R5_SelLoad4.1@63.75,106.025 63.763,106.012 63.763,104.062 R6_SelLoad4.1@63.775,104.05 v1(63.775,102.375) ; R3_SelLoad4.1@62.225,108.25 62.163,108.312 62.163,110.137 R4_SelLoad4.1@62.1,110.2 62.1,110.3 62.425,110.625 62.525,110.625 62.813,110.912 v1(64.487,110.912) ; C220_SelLoad6.1@69.75,105.075 69.8,105.075 70.9,106.175 73.175,106.175 R5_SelLoad6.1@73.325,106.025 73.338,106.012 73.338,104.062 R6_SelLoad6.1@73.35,104.05 73.35,102.477 73.4,102.427 v1(73.4,102.4) ; R3_SelLoad6.1@71.8,108.25 71.738,108.312 71.738,110.137 R4_SelLoad6.1@71.675,110.2 72.95,110.2 73.675,110.925 v1(76.35,110.925) ; v1@73.4,102.452 76.3,102.452 77.925,104.077 77.925,105.732 78.218,106.025 C220_SelLoad5.1@79.475,106.025 80.675,106.025 81.625,106.975 R5_SelLoad5.1@83.05,106.975 83.063,106.962 83.063,105.012 R6_SelLoad5.1@83.075,105 ; v1@75.488,63.688 76.762,63.688 C216_source_iref1.1@76.762,65.838 ; C220_SelLoad7.1@79.25,125.025 79.35,125.125 79.35,125.907 79.643,126.2 v1(81.121,126.2) 82.6,126.2 R5_SelLoad7.1@82.825,125.975 82.838,125.962 82.838,124.012 R6_SelLoad7.1@82.85,124 ; C220_SelLoad8.1@79.3,115.575 80.575,115.575 81.588,114.562 R6_SelLoad8.1@82.888,114.562 ; R4_SelLoad8.1@81.225,120.7 81.288,120.637 81.288,118.812 R3_SelLoad8.1@81.35,118.75 ; R4_SelLoad8.1@81.225,120.8 81.55,121.125 81.65,121.125 81.95,121.425 v1(83.525,121.425) ; R3_SelLoad7.1@81.3,128.2 81.238,128.262 81.238,130.087 R4_SelLoad7.1@81.175,130.15 81.175,130.25 81.5,130.575 81.6,130.575 81.875,130.85 v1(83.4,130.85) ; C249.2@81.308,178.864 81.347,178.825 v1(83.3,178.825) ; R3_SelLoad5.1@81.525,109.2 81.463,109.262 81.463,111.087 R4_SelLoad5.1@81.4,111.15 81.4,111.25 81.725,111.575 81.825,111.575 82.125,111.875 v1(83.775,111.875) 83.775,112.6 82.957,113.418 82.957,114.493 R6_SelLoad8.1@82.9,114.55 R6_SelLoad8.1@82.888,114.562 ; R5_SelLoad8.1@82.875,116.525 82.888,116.512 R6_SelLoad8.1@82.888,114.562 ; v1@85.687,63.688 86.962,63.688 C216_source_iref_01.1@86.962,65.838 ; C10.2@96.297,178.84 98.483,178.84 98.523,178.8 v1(98.55,178.8) ; v1@97.113,63.688 98.387,63.688 C216_source_iref2.1@98.387,65.838 ; C206.1@100.6,134.625 100.613,134.638 101.863,134.638 v1(101.875,134.65) ; C94.1@107.332,135.34 107.341,135.348 107.341,136.816 v1(107.35,136.825) ; v1@107.437,63.688 108.712,63.688 C216_source_iref_02.1@108.712,65.838 ; C107.2@111.122,178.84 111.122,175.143 110.829,174.85 C181.1@108.65,174.85 108.613,174.813 108.613,172.738 C180.1@108.575,172.7 110.325,172.7 v1(111.475,171.55) ; C17.1@111.472,167.79 111.472,171.547 v1(111.475,171.55) ; C18.1@113.037,164.21 113.037,164.16 113.437,163.76 113.487,163.76 113.94,163.306 114.905,163.306 C26.1@115.047,163.164 115.047,165.115 ; R19.1@113.497,166.09 113.781,165.805 115.456,165.805 v3(115.597,165.664) ; R20.1@115.547,171.665 115.452,171.569 111.494,171.569 v1(111.475,171.55) ; v1(117.675,140.15) 117.656,140.131 117.656,139.106 117.4,138.85 117.4,137.774 118.015,137.158 118.065,137.158 118.465,136.758 C151.1@118.465,136.708 C152.1@118.465,134.528 ; v1@117.708,140.117 117.708,140.144 117.721,140.157 120.535,140.157 120.542,140.164 122.53,140.164 122.542,140.177 122.555,140.164 124.555,140.164 124.567,140.177 124.58,140.164 126.555,140.164 126.567,140.177 126.58,140.164 128.605,140.164 128.617,140.177 128.63,140.164 130.58,140.164 130.593,140.178 132.559,140.178 132.56,140.177 132.574,140.19 134.554,140.19 134.567,140.177 134.58,140.189 136.555,140.189 136.567,140.177 136.58,140.189 138.58,140.189 138.592,140.177 142.53,140.177 C139.1@142.542,140.189 ; 117.972,165.189 119.497,165.189 119.522,165.214 C14.1@121.497,165.214 ; C148.1@118.465,126.019 C147.1@118.465,128.025 ; C147.1@118.465,128.039 C150.1@118.465,130.089 C149.1@118.465,132.268 ; v1@118.987,63.688 120.262,63.688 C216_source_iref3.1@120.262,65.838 ; v1@120.115,171.656 120.161,171.656 120.604,171.212 120.783,171.212 121.137,170.859 C15.1@121.137,168.685 ; v1(120.115,171.675) 118.839,171.675 118.546,171.968 C160.1@118.546,173.089 C159.1@121.004,173.089 C158.1@123.462,173.089 C157.1@125.92,173.089 127.614,173.089 128.15,173.625 v1(128.15,178.825) 125.972,178.825 C11.2@125.958,178.84 ; v1(120.225,161.825) 120.225,161.852 120.272,161.899 C27.1@120.272,163.14 121.174,163.14 121.467,163.432 121.467,165.185 C14.1@121.497,165.214 ; C14.1@121.522,165.239 C14.1@121.497,165.214 ; v1(129.101,63.698) 129.113,63.685 130.388,63.685 130.388,65.835 C216_source_iref_03.1@130.401,65.848 ; v1(140.625,63.7) 140.638,63.688 141.912,63.688 141.912,65.838 C216_source_iref4.1@141.925,65.85 ; C110.2@140.792,178.84 142.987,178.84 143.023,178.875 v1(143.05,178.875) ; v1(146.042,173.039) 147.418,173.039 C177.1@147.468,173.089 147.518,173.039 149.876,173.039 C176.1@149.926,173.089 C175.1@152.384,173.089 C174.1@154.842,173.089 ; v1@150.812,63.688 152.087,63.688 C216_source_iref_04.1@152.087,65.838 ; C227.2@155.85,178.85 155.875,178.825 v1(158.025,178.825) ; v1@162.363,63.687 163.637,63.687 C216_source_iref5.1@163.637,65.837 ; v1(165.475,95.1) 166.905,95.1 167.198,95.393 U39.1@167.198,96.341 ; v1(165.475,99.925) 166.905,99.925 167.198,100.218 U32.1@167.198,101.166 ; v1(165.475,104.75) 166.905,104.75 167.198,105.043 U36.1@167.198,105.991 ; v1(165.475,109.575) 166.905,109.575 167.198,109.868 U37.1@167.198,110.816 ; v1(165.475,114.4) 166.905,114.4 167.198,114.693 U44.1@167.198,115.641 ; v1(165.475,119.225) 166.905,119.225 167.198,119.518 U45.1@167.198,120.466 ; v1(165.475,124.05) 166.905,124.05 167.198,124.343 U49.1@167.198,125.291 ; v1(166.175,91.9) 166.194,91.881 167.168,91.881 167.198,91.851 U43.1@167.198,91.491 ; C226.2@170.825,178.85 v1(173.125,178.85)
  Bottom Layer w1: v1(73.5,189.025) 73.51,189.015 C233.2@75.949,189.015 C234.2@79.624,189.015 ; v1@88.144,188.979 C236.2@90.583,188.979 C244.2@94.258,188.979 ; v1@103.108,189.004 C99.2@105.547,189.004 C100.2@109.222,189.004 ; v1@117.858,189.004 C108.2@120.297,189.004 C109.2@123.972,189.004 ; v1@132.643,189.004 C96.2@135.083,189.004 C97.2@138.758,189.004 ; v1@147.578,189.004 C214.2@150.017,189.004 C215.2@153.692,189.004 ; v1@162.386,189.015 C228.2@164.825,189.015 C229.2@168.5,189.015 ; v1@177.261,189.015 C224.2@179.7,189.015 C225.2@183.375,189.015
  other v1: 75.475,63.7 85.675,63.7 97.1,63.7 107.425,63.7 118.975,63.7 150.8,63.7 162.35,63.7 90.621,70.621 102.046,70.621 112.371,70.621 123.921,70.621 80.425,70.625 145.575,70.625 155.75,70.625 167.3,70.625 35.675,140.85 35.175,146 88.134,188.989 103.098,189.014 117.848,189.014 132.633,189.014 147.568,189.014 162.376,189.025 177.251,189.025
  other v2: 151.766,160.58 135.848,160.688 150.75,161.596 151.766,161.596 134.832,161.704 135.848,161.704 174.278,168.723 175.294,168.723 135.891,168.932 151.908,169.115 174.278,169.739 175.294,169.739 134.875,169.948 135.891,169.948 150.892,170.131 151.908,170.131
  other v3: 116.247,165.664 116.847,165.664 117.497,165.664 116.247,166.326 116.847,166.326 187.895,166.586 187.895,167.236 188.557,167.236 187.895,167.836 188.557,167.836
  other v4: 177.868,143.985 178.968,143.985 180.068,143.985 176.768,145.085 177.868,145.085 180.068,145.085 176.768,146.185 177.868,146.185 178.968,146.185 178.968,147.285 180.068,147.285
  other v6: 116.247,167.006
A2: C67.1 C69.1 C71.1 C73.1 C82.1 C84.1 C86.1 C88.1 C115.2 C116.2 C117.2 C118.2 C119.2 C120.2 C121.2 C122.2 C123.2 C124.2 C125.2 C126.2 C180.2 C181.2 C187.2 C191.2 C194.2 C196.2 C199.2 C201.2 C213.2 J2.A3 J2.A6 J2.B2 J2.B9 J2.B10 J2.E1 J2.F13 J2.H11 J2.L6 J2.L13 J2.M3 J2.M8 J2.N4 R40.1 R41.2 R44.2 R77.2 U10.1 U11.1 U12.1 U12.5 U13.1 U15.1 U16.1 U16.5 U17.1 U18.1 U18.5 U24.14 U25.1 U28.1 U50.14 U56.2 VDDIO.1 | length 128.9
  Top Layer w0.25: U28.1@30.372,109.881 29.346,109.881 29.2,110.027 v1(29.2,111.775) 30.575,111.775 C201.2@30.625,111.825 ; U25.1@36.891,136.926 40.8,136.926 ; R41.2@37.225,131.175 37.246,131.154 v1(38.276,131.154) ; R44.2@37.975,103.65 37.975,101.675 C199.2@37.95,101.65 v1(37.95,100.15) v1@38.025,100.075 ; v1@38.276,131.175 38.296,131.154 39.404,131.154 C196.2@39.425,131.175 ; v1(40.8,135.8) 40.8,136.61 40.8,136.926 ; C194.2@40.8,138.85 40.8,136.926 ; R40.1@111.417,111.6 112.5,111.6 ; C191.2@113.492,111.6 112.5,111.6 ; v1(113.525,110.375) 113.525,111.139 C191.2@113.547,111.161 ; C191.2@113.553,111.161 112.939,111.161 112.939,111.578 112.917,111.6 112.5,111.6 ; U50.14@115.217,129.718 115.297,129.638 115.297,129.046 115.444,128.9 v1(116.15,128.9) ; C187.2@115.492,115.389 117.011,115.389 117.412,114.988 v1(117.412,112.841) ; v1@165.975,135.496 U18.1@168.008,135.496 ; v1@165.975,141.41 U16.1@168.008,141.41 ; v1(165.975,150.4) 166.042,150.333 167.956,150.333 U12.1@168.008,150.281 ; v1@166.025,153.134 166.12,153.134 166.204,153.218 U11.1@168.017,153.218 ; v1(166.1,138.425) 166.104,138.429 168.013,138.429 U17.1@168.017,138.433 ; v1@166.1,144.4 166.126,144.374 168.002,144.374 U15.1@168.008,144.367 ; v1@166.1,147.4 166.148,147.352 167.98,147.352 U13.1@168.008,147.324 ; v1(167.05,156.25) 167.088,156.212 167.979,156.212 U10.1@168.017,156.175 ; U16.1@168.009,141.369 168.656,141.369 169.289,140.736 U16.5@170.192,140.736 ; U18.1@168.017,135.476 168.774,135.476 169.424,134.826 U18.5@170.217,134.826 ; U12.1@168.017,150.261 168.034,150.244 168.681,150.244 169.314,149.611 U12.5@170.217,149.611
  Top Layer w1: VDDIO.1@166.5,177.425 U56.2@166.5,183.379
  Bottom Layer w0.25: U24.14@65.75,118.43 65.762,118.418 65.762,116.037 v1(65.775,116.025) 67.85,116.025 R77.2@67.9,116.075 ; v1(105.65,172.7) C180.2@106.975,172.7 106.975,174.775 C181.2@107.05,174.85 ; v1(116.15,128.9) 116.15,130.147 C213.2@116.167,130.164 ; C125.2@117.999,107.038 C126.2@120.103,107.038 123.78,107.038 J2.B2@124.967,108.224 ; C120.2@128.267,138.564 130.047,138.565 J2.N4@130.047,136.164 ; C119.2@130.542,138.564 C119.2@130.592,138.564 ; C121.2@133.043,103.612 C122.2@135.12,103.612 ; J2.A6@135.127,105.684 135.12,105.678 C122.2@135.12,103.612 ; C122.2@135.147,103.612 C122.2@135.12,103.612 ; C124.2@141.275,103.641 C123.2@143.129,103.641 ; J2.B9@142.747,108.224 143.967,108.224 ; C123.2@143.354,103.641 143.354,104.552 143.967,105.164 143.967,108.224 ; J2.B10@145.287,108.224 143.967,108.224 ; J2.F13@152.907,118.384 153.937,119.414 C117.2@155.217,119.414 155.242,119.414 C118.2@155.242,121.464 ; J2.L13@152.907,131.084 152.927,131.084 153.667,131.825 155.109,131.825 C116.2@155.219,131.936 C115.2@155.219,129.832 ; v1(165.975,144.4) 166.027,144.452 166.027,145.904 166.174,146.05 C73.1@168.15,146.05 ; v1(165.975,147.4) 165.968,147.407 165.968,148.845 166.115,148.992 C71.1@168.15,148.992 ; v1@166.025,153.134 166.025,152.08 166.171,151.933 C69.1@168.15,151.933 ; v1@166.05,141.506 166.042,141.514 166.042,142.792 166.325,143.075 C82.1@168.15,143.075 ; v1(166.1,138.425) 166.11,138.435 166.11,139.76 166.425,140.075 C84.1@168.15,140.075 ; v1(167.05,156.25) 166.997,156.303 166.203,156.303 166.025,156.125 166.025,155.1 166.25,154.875 C67.1@168.15,154.875 ; C88.1@168.15,134.15 166.225,134.15 165.95,134.425 165.95,135.387 166.096,135.534 166.042,135.588 166.042,137.029 166.188,137.175 C86.1@168.15,137.175
  other v1: 165.975,135.534 165.975,141.448 165.975,153.134
BOOT_MODE_0: FMC1.D14 R81.1 | length 93.2
  Top Layer w0.25: v1(43.2,141.85) v1(44.4,141.85)
  Bottom Layer w0.25: FMC1.D14@37.592,137.922 38.145,138.475 43.087,138.475 43.775,139.163 43.775,140.68 43.267,141.188 43.267,141.783 v1(43.2,141.85) ; v1(44.4,141.85) 44.412,141.85 44.91,142.348 90.612,142.348 93.55,139.41 93.55,115.832 94.873,114.508 R81.1@101.225,114.508
BOOT_MODE_0_BUF: J2.G11 R81.2 | length 50.6
  Bottom Layer w0.25: R81.2@103.225,114.575 103.95,114.575 106.225,116.85 118.26,116.85 119.3,117.89 119.3,121.879 119.607,122.185 146.567,122.185 J2.G11@147.827,120.924
BOOT_MODE_1: FMC1.D15 R82.1 | length 94.2
  Bottom Layer w0.25: FMC1.D15@37.592,136.652 38.137,137.197 38.908,137.197 39.136,137.425 43.475,137.425 44.475,138.425 44.475,141.075 45.398,141.998 90.467,141.998 93.2,139.265 93.2,114.225 94.833,112.592 R82.1@101.225,112.592
BOOT_MODE_1_BUF: J2.G12 R82.2 | length 56.1
  Bottom Layer w0.25: R82.2@103.225,112.675 104.35,112.675 104.55,112.875 104.55,114.68 106.37,116.5 118.405,116.5 119.675,117.77 119.675,121.45 120.06,121.835 146.172,121.835 146.618,121.389 146.618,120.289 147.092,119.814 149.257,119.814 J2.G12@150.367,120.924
CLK_3V3: R38.2 U50.3 | length 3.1
  Top Layer w0.25: R38.2@112.742,137.589 113.771,137.589 113.917,137.443 U50.3@113.917,135.56
CLK_I: FMC1.C26 R83.1 | length 76.6
  Top Layer w0.25: v1(88.625,122.975) 95.3,122.975 v1(95.325,123)
  Bottom Layer w0.25: FMC1.C26@38.862,122.682 39.819,121.725 68.05,121.725 68.675,122.35 88,122.35 v1(88.625,122.975) ; v1(95.325,123) 95.3,122.975 95.3,119.771 96.171,118.9 R83.1@110.875,118.9
CLK_MUXED: E2.1 J2.H2 J4.2 R79.1 | length 54.6
  Top Layer w0.25: E2.1@107.55,149.75 109.075,149.75 110.125,148.7 R79.1@111.85,148.7 ; R79.1@111.825,148.685 111.825,146.7 112.468,146.057 123.56,146.057 123.707,145.91 123.707,124.725 J2.H2@124.967,123.464
  Bottom Layer w0.25: J4.2@112.986,123.764 114.149,124.927 117.123,124.927 117.5,124.55 123.8,124.55 J2.H2@124.671,123.679
CLK_SEL: FMC1.D11 R80.1 | length 108.5
  Top Layer w0.25: v1(41.35,142.375) 41.416,142.375 41.671,142.631 44.45,142.631 v1(44.517,142.698)
  Bottom Layer w0.25: FMC1.D11@37.592,141.732 38.235,142.375 v1(41.35,142.375) ; v1(44.517,142.698) 90.757,142.698 93.9,139.555 93.9,122.842 94.6,122.142 94.6,119.375 96.425,117.55 117.625,117.55 118.55,118.475 R80.1@118.55,123.45
CLK_SEL_BUF: J2.H1 R80.2 | length 1.9
  Bottom Layer w0.25: R80.2@120.557,123.457 J2.H1@122.42,123.457
  Bottom Layer w0.5: R80.2@120.55,123.45 R80.2@120.557,123.457 ; J2.H1@122.42,123.457 J2.H1@122.427,123.464
D_N: J1.5 J1.12 U14.7 U51.1 | length 11.8
  Top Layer w0.11: U14.7@182.893,144.885 183.096,144.885 183.227,145.016 188.325,145.016 188.326,145.015 U51.1@188.326,144.278 ; 188.326,145.017 190.258,145.017 v5(190.625,144.65) 190.625,144.725 191.516,145.616 J1.5@191.516,145.69 192.366,144.84 J1.12@192.866,144.84